# EAGLE board blmc_quad (EAGLE 4.15)

Size 135.49 x 98.22 mm. Coordinates in mm from the lower left corner, seen from the top.
Outline: 0,0 135.49,0 135.49,98.22 0,98.22 0,0
Copper layers (1*2+15*16): Top 0.035mm / dielectric 0.2mm / Route2 0.035mm / dielectric 1.5mm / Route15 0.035mm / dielectric 0.2mm / Bottom 0.035mm
Design rules "eurocircuits_verified_4l": minimum track width 0.15mm, minimum drill 0.35mm, track to track 0.15mm, track to pad 0.15mm, pad to pad 0.15mm, via to via 0.15mm, smd to smd 0.15mm, copper to edge 20mil, drill to drill 8mil, minimum pad ring 10mil, minimum via ring 7mil, stop-mask expansion 4mil, vias tented up to drill 0mil, thermal gap 10mil

## Footprints (pad centres in the part's own frame; a part is rotated, then mirrored left to right if it is on the bottom)
SOLDER_PAD_200_50 = smd 5.08 x 1.524: P$1 0,0
SO-8 = smd 1.524 x 0.61: 1 -2.743,1.27; 2 -2.743,0; 3 -2.743,-1.27; 4 -2.743,-2.54; 5 2.743,-2.54; 6 2.743,-1.27; 7 2.743,0; 8 2.743,1.27
R0603 = smd 1 x 1.1: 1 -0.85,0; 2 0.85,0
SOT23 = smd 1 x 1.4: 1 -0.95,-1.1; 2 0.95,-1.1; 3 0,1.1

## Placement (x,y rotation side)
MOT_A  SOLDER_PAD200_50  [SOLDER_PAD_200_50]  117.6,90.26 270 top
MOT_B  SOLDER_PAD200_50  [SOLDER_PAD_200_50]  117.6,81.37 90 top
MOT_C  SOLDER_PAD200_50  [SOLDER_PAD_200_50]  117.6,71.21 90 top
NFET_A  SI4420N  [SO-8]  123.95,90.26 180 top
NFET_B  SI4420N  [SO-8]  123.95,81.37 180 top
NFET_C  SI4420N  [SO-8]  123.95,71.21 180 top
PFET_A  SI4425P  [SO-8]  111.25,91.53 0 top
PFET_B  SI4425P  [SO-8]  111.25,82.64 0 top
PFET_C  SI4425P  [SO-8]  111.25,72.48 0 top
R1  33R  [R0603]  104.9,88.99 0 top
R2  680R  [R0603]  104.9,92.8 0 top
R3  47k  [R0603]  94.74,91.53 180 top
R4  10k  [R0603]  94.74,94.07 0 top
R5  47k  [R0603]  130.3,88.99 0 top
R6  100R  [R0603]  130.3,92.8 180 top
R7  33R  [R0603]  104.9,80.1 0 top
R8  680R  [R0603]  104.9,83.91 0 top
R9  47k  [R0603]  94.74,82.64 180 top
R10  10k  [R0603]  94.74,85.18 0 top
R11  47k  [R0603]  130.3,80.1 0 top
R12  100R  [R0603]  130.3,83.91 180 top
R13  33R  [R0603]  104.9,69.94 0 top
R14  680R  [R0603]  104.9,73.75 0 top
R15  47k  [R0603]  94.74,72.48 180 top
R16  10k  [R0603]  94.74,75.02 0 top
R17  47k  [R0603]  130.3,69.94 0 top
R18  100R  [R0603]  130.3,73.75 180 top
R19  10k  [R0603]  85.85,88.99 0 top
R20  2K2  [R0603]  80.77,88.99 0 top
R21  2K2  [R0603]  80.77,92.8 0 top
R22  10k  [R0603]  85.85,80.1 0 top
R23  2K2  [R0603]  80.77,80.1 0 top
R24  2K2  [R0603]  80.77,83.91 0 top
R25  10k  [R0603]  85.85,69.94 0 top
R26  2K2  [R0603]  80.77,69.94 0 top
R27  2K2  [R0603]  80.77,73.75 0 top
TA  BC847  [SOT23]  99.82,92.8 270 top
TB  BC847  [SOT23]  99.82,83.91 270 top
TC  BC847  [SOT23]  99.82,73.75 270 top

## Library data of the parts
MOT_A MOT_B MOT_C = paparazzi
NFET_A NFET_B NFET_C PFET_A PFET_B PFET_C = bko
R1-R27 = rcl
TA TB TC = transistor-npn

## Nets
+UB: PFET_A.1 PFET_B.1 PFET_C.1 R2.2 R8.2 R14.2
COMP_A: R19.1 R20.2 R21.2
COMP_B: R22.1 R23.2 R24.2
COMP_C: R25.1 R26.2 R27.2
COMP_COM: R21.1 R24.1 R27.1
GND: NFET_A.1 NFET_B.1 NFET_C.1 R3.1 R5.1 R9.1 R11.1 R15.1 R17.1 R20.1 R23.1 R26.1 TA.2 TB.2 TC.2
MOT_A: MOT_A.P$1 NFET_A.5 NFET_A.6 NFET_A.7 NFET_A.8 PFET_A.5 PFET_A.6 PFET_A.7 PFET_A.8 R19.2
MOT_B: MOT_B.P$1 NFET_B.5 NFET_B.6 NFET_B.7 NFET_B.8 PFET_B.5 PFET_B.6 PFET_B.7 PFET_B.8 R22.2
MOT_C: MOT_C.P$1 NFET_C.5 NFET_C.6 NFET_C.7 NFET_C.8 PFET_C.5 PFET_C.6 PFET_C.7 PFET_C.8 R25.2
N$1: PFET_A.4 R1.2
N$2: R1.1 R2.1 TA.3
N$3: R3.2 R4.2 TA.1
N$4: NFET_A.4 R5.2 R6.2
N$5: R9.2 R10.2 TB.1
N$6: R7.1 R8.1 TB.3
N$7: NFET_B.4 R11.2 R12.2
N$8: PFET_B.4 R7.2
N$9: R15.2 R16.2 TC.1
N$10: R13.1 R14.1 TC.3
N$11: NFET_C.4 R17.2 R18.2
N$12: PFET_C.4 R13.2
NFET_A: R6.1
NFET_B: R12.1
NFET_C: R18.1
PFET_A: R4.1
PFET_B: R10.1
PFET_C: R16.1

## Tracks (layer width: path | path; a pad name or v marks a point on that pad's centre or on a via)
+UB  (5 unrouted)
COMP_A  (2 unrouted)
COMP_B  (2 unrouted)
COMP_C  (2 unrouted)
COMP_COM  (2 unrouted)
GND  (14 unrouted)
MOT_A  (9 unrouted)
MOT_B  (9 unrouted)
MOT_C  (9 unrouted)
N$1  (1 unrouted)
N$2  (2 unrouted)
N$3  (2 unrouted)
N$4  (2 unrouted)
N$5  (2 unrouted)
N$6  (2 unrouted)
N$7  (2 unrouted)
N$8  (1 unrouted)
N$9  (2 unrouted)
N$10  (2 unrouted)
N$11  (2 unrouted)
N$12  (1 unrouted)